# Altium PCB pr4.PcbDoc
Units mil, origin at the board's own origin, x right, y up, seen from the top; angles counter-clockwise.
Board outline 5464.57 x 2015.75 mil, 2 copper layers (Top Layer, Top, Bottom Layer, Bottom); 22 components, 14 nets, 57 pads, 0 vias.
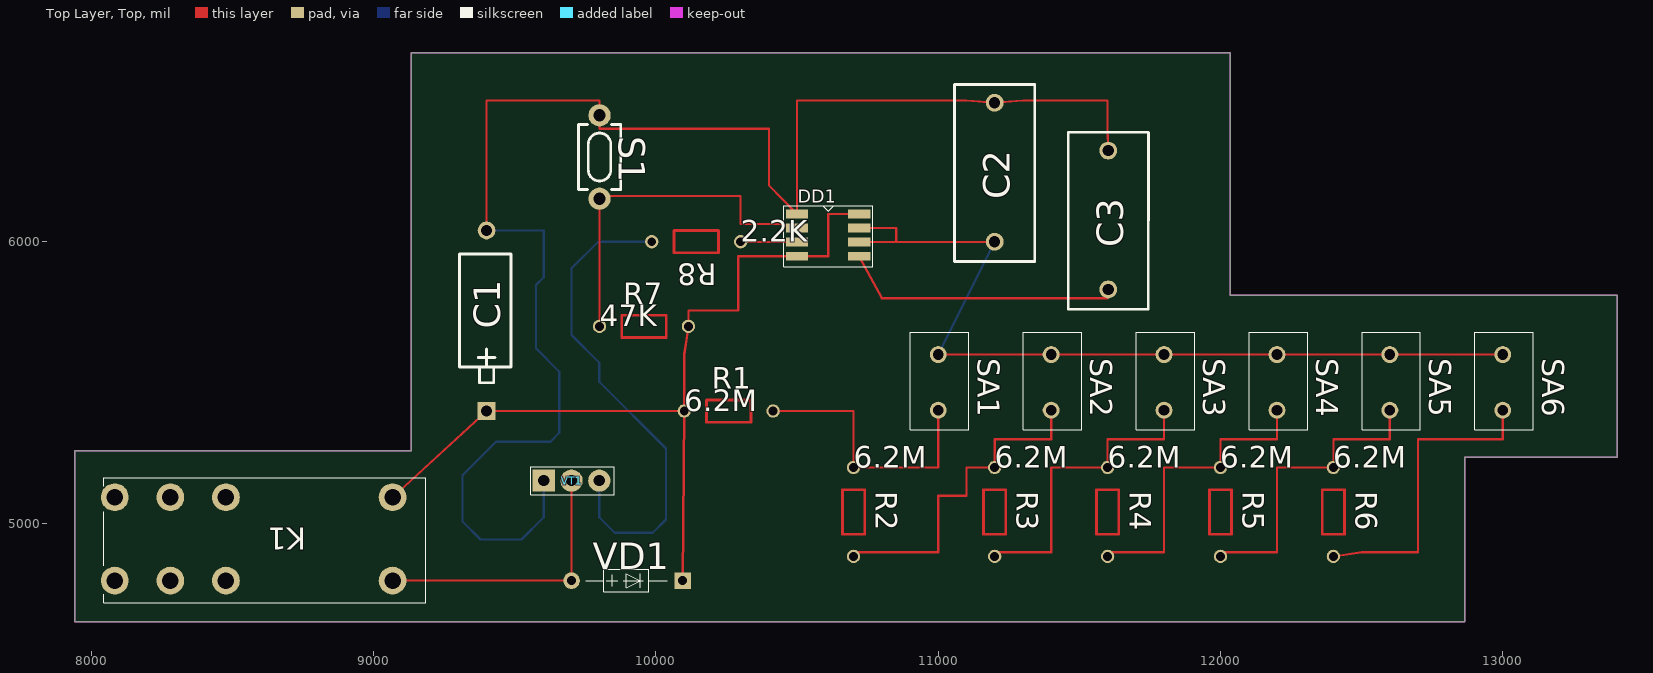
[diagram p0: Top Layer, Top view]
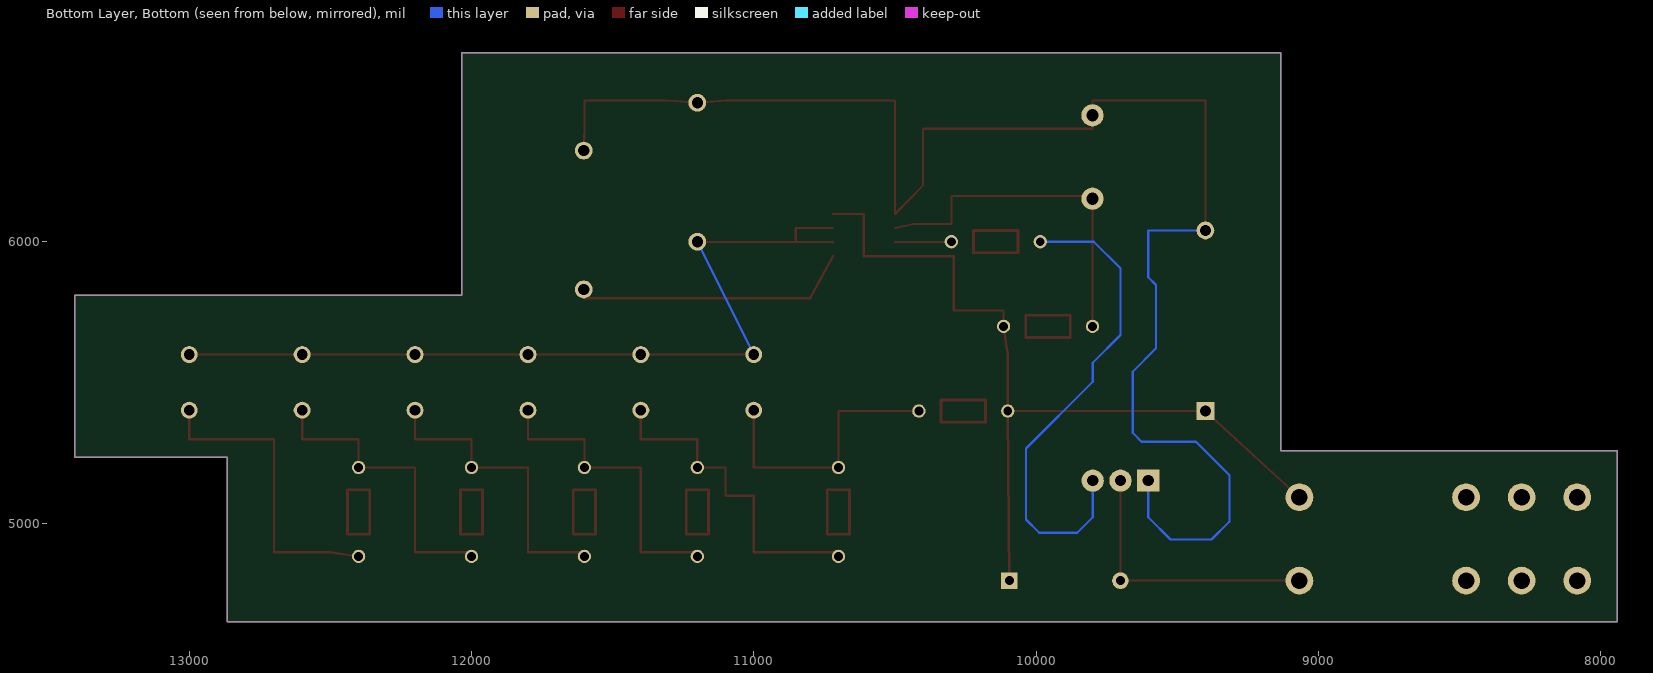
[diagram p1: Bottom Layer, Bottom view, seen from below]

## Layer stack, top to bottom
Top Solder, Top Mask: solder mask 0.4, Solder Resist, Dk 3.5
Top Layer, Top: signal copper 1.4
Dielectric 1: dielectric 12.6, FR-4, Dk 4.8
Bottom Layer, Bottom: signal copper 1.4
Bottom Solder, Bot Mask: solder mask 0.4, Solder Resist, Dk 3.5

## Board outline
7940.94,4653.54 12866.14,4653.54 12866.14,5236.22 13405.51,5236.22 13405.51,5811.02 12035.43,5811.02 12035.43,6669.29 9133.86,6669.29 9133.86,5259.84 7940.94,5259.84

## Design rules (kind name [scope] priority, off if disabled: settings)
Clearance [All] p1: gap=10 ignorepadtopadclearanceinfootprint=FALSE except(0: Arc-Hole Track-Hole SMDPad-Hole THPad-Hole Via-Hole Fill-Hole Poly-Hole Region-Hole Text-Hole; 12: Arc-Arc Arc-Track Arc-THPad Arc-Via Track-Track Track-THPad Track-Via THPad-THPad THPad-Via Via-Via)
PlaneClearance [All] p1: clearance=10
PolygonConnect [All] p1: connectstyle=Relief reliefconductorwidth=10 reliefentries=4 polygonreliefangle="90 Angle" airgapwidth=10
RoutingVias [All] p1: holewidth=28 width=50 viastyle="Through Hole" minholewidth=28 minwidth=50 maxholewidth=28 maxwidth=50
SolderMaskExpansion [All] p1: expansion=4 istentingtop=FALSE
Width [All] p1: maxlimit=10 minlimit=10 preferedwidth=10
29 further rules are at their usual default settings.

## Components (designator, comment, footprint, x,y, rotation, side; value= is the part's Value field where it differs from the comment)
C1 "100" K534A-1 9400,5400 r90 top
C2 "33" K1047-5_Primary 11200,6000 r90 top
C3 "0.1" K1047-5_Primary 11602.36,5830.71 r90 top
DD1 "" SO-8 10500,6098.43 r0 top
K1 "" К40.52_40.52(Primary) 9066.93,5094.49 r180 top
R1 "6.2M" R100 10100,5400 r0 top
R2 "6.2M" R100 10700,5200 r270 top
R3 "6.2M" R100 11200,5200 r270 top
R4 "6.2M" R100 11600,5200 r270 top
R5 "6.2M" R100 12000,5200 r270 top
R6 "6.2M" R100 12400,5200 r270 top
R7 "47K" R100 9800,5700 r0 top
R8 "2.2K" R100 10300,6000 r180 top
S1 "" PKN159-1 9800,6300 r270 top
SA1 "" 8AS9M2RE 11000,5600 r270 top
SA2 "" 8AS9M2RE 11400,5600 r270 top
SA3 "" 8AS9M2RE 11800,5600 r270 top
SA4 "" 8AS9M2RE 12200,5600 r270 top
SA5 "" 8AS9M2RE 12600,5600 r270 top
SA6 "" 8AS9M2RE 13000,5600 r270 top
VD1 "" КД521(522)_КД522А(Primary) 10094.49,4799.21 r0 top
VT1 "" KT13_КТ315В(Primary) 9602.36,5153.54 r270 top

## Footprints (in the part's own frame and the unit in brackets; to place one, negate y for a bottom-side part, rotate by r counter-clockwise, add the part's x,y. Pads: shape width x height; smd on the part's side, far side on the other; paste and mask are expansions set on the pad)
8AS9M2RE [mil]
  round 60 hole 38: 1(0,0) 2(196.85,0)
  silkscreen extent -79,-98 266,108
K534A-1 [mm]
  rect 1.6x1.6 hole 1: 1(0,0)
  round 1.6 hole 1: 2(16.25,0)
  silkscreen extent 2.54,-2.18 14.12,2.44
K1047-5_Primary [mm]
  round 1.6 hole 1: 1(0,0) 2(12.5,0)
  silkscreen extent -1.78,-3.61 14.15,3.61
KT13_КТ315В(Primary) [mm]
  rect 2x2 hole 1: 1(0,0)
  round 2 hole 1: 2(0,5) 3(0,2.5)
  silkscreen extent -1.25,-1.17 1.25,6.33
PKN159-1 [mm]
  round 2 hole 1.1: 1(-3.75,0) 2(3.75,0)
  silkscreen extent -2.92,-1.9 2.92,1.91
R100 [mm]
  round 1.2 hole 0.8: 1(0,0) 2(8,0)
  Top Layer, Top lines w0.254: 2,-1 6,-1 6,1 2,1 2,-1
SO-8 [mm]
  rect 2x0.8 smd: 1(0,0) 2(0,-1.27) 3(0,-2.54) 4(0,-3.81) 5(5.588,-3.81) 6(5.588,-2.54) 7(5.588,-1.27) 8(5.588,0)
  silkscreen extent -1.21,-4.75 6.79,0.75
К40.52_40.52(Primary) [mm]
  round 2.5 hole 1.5: 11(20,7.5) 12(15,7.5) 14(25,7.5) 21(20,0) 22(15,0) 24(25,0) A1(0,0) A2(0,7.5)
  silkscreen extent -3,-1.75 26,9.5
КД521(522)_КД522А(Primary) [mm]
  round 1.5 hole 0.8: 1(-10,0)
  rect 1.5x1.5 hole 0.8: 2(0,0)
  silkscreen extent -8.71,-1.02 -1.4,1.02

## Nets (pads, with @x,y where several pads share a name; then routed paths per layer and width w, separated by ;. In a path a pad name is that pad's centre, name@x,y a point inside that pad or via, vN(x,y) a via of type N, cw(c..) or ccw(c..) an arc to the next point about the centre after c; other vN are vias at no path point)
+5B: C1.1 DD1.4 DD1.8 K1.A1 R1.1 R7.2 VD1.2 | length 3057.4
  Top Layer, Top w7.87: K1.A1 C1.1 R1.1 ; VD1.2 R1.1 ; DD1.8 10610.24,6098.43 10610.24,5948.43 DD1.4 10291.34,5948.43 10291.34,5755.91 10114.96,5755.91 R7.2 10100,5600 R1.1
-14B: C1.2 C2.2 C3.2 DD1.1 S1.1 VT1.1 | length 5593
  Top Layer, Top w7.87: C1.2 9400,6500 9800,6500 S1.1 9800,6400 10400,6400 10400,6200 DD1.1 10500,6500 11100,6500 C2.2 11300,6500 11600,6500 11600,6400 C3.2
  Bottom Layer, Bottom w7.87: C1.2 9602.36,6039.76 9602.36,5874.02 9574.8,5846.46 9574.8,5622.05 9657.48,5539.37 9657.48,5322.83 9625.98,5291.34 9433.07,5291.34 9314.96,5173.23 9314.96,5007.87 9377.95,4944.88 9523.62,4944.88 9602.36,5023.62 VT1.1
NET00000: K1.A2 VD1.1 VT1.3 | length 992.9
  Top Layer, Top w7.87: K1.A2 VD1.1 ; VT1.3 VD1.1 ; VD1.1@9705.51,4799.21 VD1.1
NET00001: R8.2 VT1.2 | length 1760.3
  Bottom Layer, Bottom w7.87: VT1.2 9799.21,5023.62 9854.33,4968.5 9988.19,4968.5 10035.43,5015.75 10035.43,5267.72 9799.21,5503.94 9799.21,5570.87 9700.79,5669.29 9700.79,5905.51 9795.28,6000 R8.2
NET00002: DD1.3 R8.1 | length 200
  Top Layer, Top w7.87: R8.1 DD1.3
NET00003: C3.1 DD1.5 | length 999.4
  Top Layer, Top w7.87: DD1.5 10800,5800 11600,5800 C3.1
NET00004: R1.2 R2.1 SA1.2 | length 988.2
  Top Layer, Top w7.87: R1.2 10700,5400 R2.1 11000,5200 SA1.2
NET00005: R2.2 R3.1 SA2.2 | length 1218.1
  Top Layer, Top w7.87: R2.2 10700,4900 11000,4900 11000,5100 11100,5100 11100,5200 R3.1 11200,5300 11400,5300 SA2.2
NET00006: R3.2 R4.1 SA3.2 | length 1118.1
  Top Layer, Top w7.87: R3.2 11200,4900 11400,4900 11400,5200 R4.1 11600,5300 11800,5300 SA3.2
NET00007: R4.2 R5.1 SA4.2 | length 1118.1
  Top Layer, Top w7.87: R4.2 11600,4900 11800,4900 11800,5200 R5.1 12000,5300 12200,5300 SA4.2
NET00008: R5.2 R6.1 SA5.2 | length 1118.1
  Top Layer, Top w7.87: R5.2 12000,4900 12200,4900 12200,5200 R6.1 12400,5300 12600,5300 SA5.2
NET00009: R6.2 SA6.2 | length 1104.3
  Top Layer, Top w7.87: R6.2 12500,4900 12700,4900 12700,5300 13000,5300 SA6.2
NET00010: DD1.2 R7.1 S1.2 | length 1253.5
  Top Layer, Top w7.87: R7.1 S1.2 9834.65,6161.42 10299.21,6161.42 10299.21,6062.99 10433.07,6062.99 DD1.2
NET00012: C2.1 DD1.6 DD1.7 SA1.1 SA2.1 SA3.1 SA4.1 SA5.1 SA6.1 | length 3107.9
  Top Layer, Top w7.87: DD1.6 10851.13,5998.86 ; DD1.7 10851.13,6048.43 10851.13,5998.86 ; SA1.1 SA2.1 SA3.1 SA4.1 SA5.1 SA6.1 ; C2.1 10851.13,5998.86
  Bottom Layer, Bottom w7.87: SA1.1 C2.1
pads on no net: K1.11 K1.12 K1.14 K1.21 K1.22 K1.24

## Keep-outs
Keep-Out Layer, Board:
  the board outline again, w5

## Text inside footprints (layer, text, board x,y; h text height)
VT1: Mechanical 1, Top Assy "Б" at 9782.68,5242.13 h39.37 r270; Mechanical 1, Top Assy "К" at 9684.25,5242.13 h39.37 r270; Mechanical 1, Top Assy "Э" at 9575.98,5242.13 h39.37 r270